# EAGLE board telegraph (EAGLE 6.4)
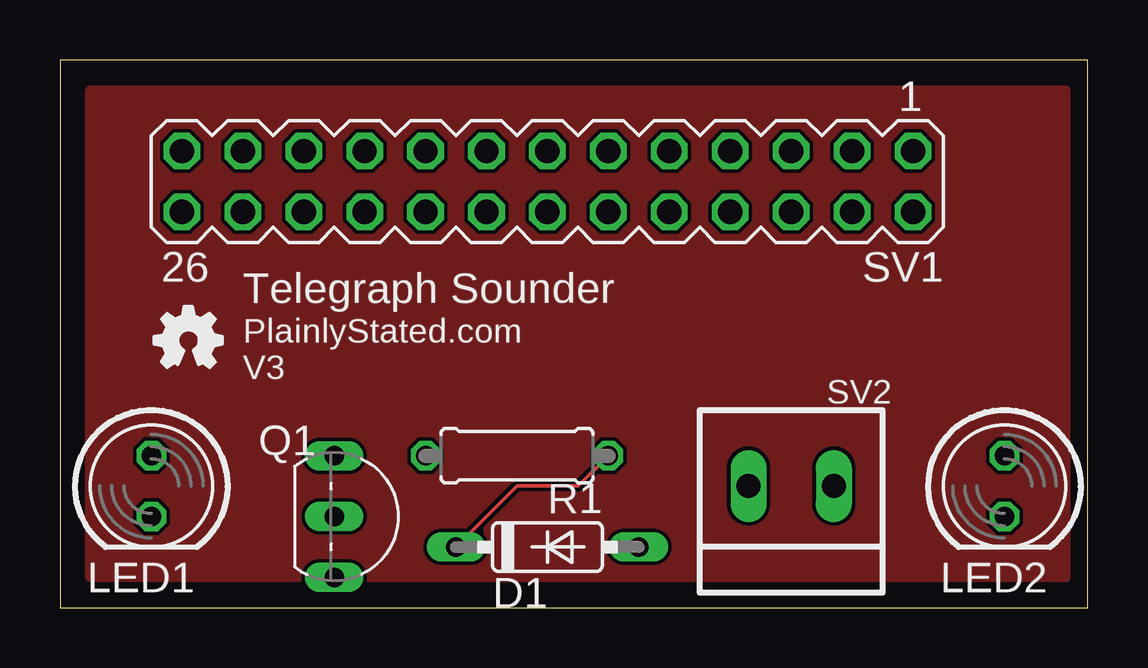
[diagram p0: board, top side]
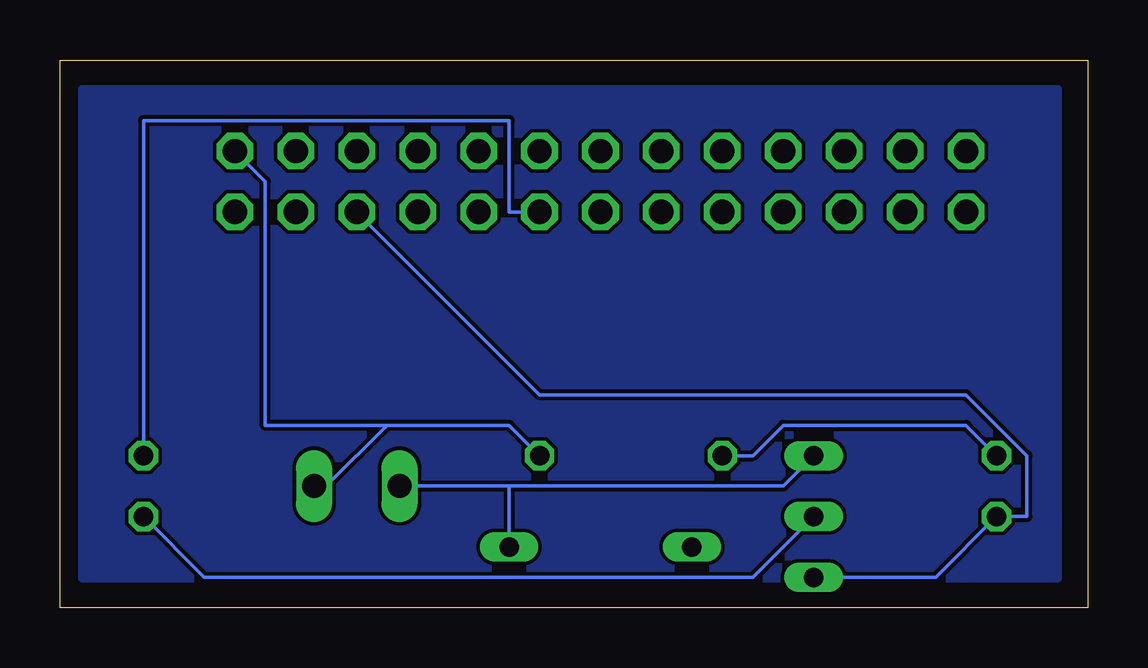
[diagram p1: board, bottom side, seen from below]

Size 42.85 x 22.85 mm. Coordinates in mm from the lower left corner, seen from the top.
Outline: 0,0 42.85,0 42.85,22.85 0,22.85 0,0
Copper layers (1*16): Top 0.0356mm / dielectric 1.5011mm / Bottom 0.0356mm
Design rules "default": minimum track width 6mil, minimum drill 13mil, track to track 6mil, track to pad 6mil, pad to pad 6mil, via to via 6mil, smd to smd 6mil, copper to edge 15mil, drill to drill 6mil, minimum pad ring 7mil, minimum via ring 7mil, stop-mask expansion 4mil, vias tented up to drill 0mil, thermal gap 10mil

## Footprints (pad centres in the part's own frame; a part is rotated, then mirrored left to right if it is on the bottom)
DO35-7 = drill 0.813 long: A 3.81,0; C -3.81,0
LED5MM = drill 0.813 octagon: A -1.27,0; K 1.27,0
TO92-EBC = drill 0.813 long: B 0,-1.27; C -2.54,-1.27; E 2.54,-1.27
0207/7 = drill 0.813 octagon: 1 -3.81,0; 2 3.81,0
MA13-2 = drill 1.016 octagon: 1 -15.24,-1.27; 2 -15.24,1.27; 3 -12.7,-1.27; 4 -12.7,1.27; 5 -10.16,-1.27; 6 -10.16,1.27; 7 -7.62,-1.27; 8 -7.62,1.27; 9 -5.08,-1.27; 10 -5.08,1.27; 11 -2.54,-1.27; 12 -2.54,1.27; 13 0,-1.27; 14 0,1.27; 15 2.54,-1.27; 16 2.54,1.27; 17 5.08,-1.27; 18 5.08,1.27; 19 7.62,-1.27; 20 7.62,1.27; 21 10.16,-1.27; 22 10.16,1.27; 23 12.7,-1.27; 24 12.7,1.27; 25 15.24,-1.27; 26 15.24,1.27
HEADER2 = drill 1 long: 1 -1.778,0; 2 1.778,0

## Placement (x,y rotation side)
D1  1N4148  [DO35-7]  20.32,2.54 0 top
LED1  red  [LED5MM]  3.81,5.08 270 top
LED2  green  [LED5MM]  39.37,5.08 270 top
Q1  MPSA42  [TO92-EBC]  12.7,3.81 270 top
R1  470  [0207/7]  19.05,6.35 0 top
SV1  SV1  [MA13-2]  20.32,17.78 180 top
SV2  HEADER2  [HEADER2]  30.48,5.08 180 top
U$1  [OSHW_FILLX100_NOTEXT]  3.94,10.03 0 top

## Library data of the parts
D1 = diode
LED1 LED2 = led
Q1 = transistor-npn
R1 = rcl
SV1 = con-lstb; OC_FARNELL: unknown; OC_NEWARK: unknown
SV2 = plainlystated
U$1 = ohw-logo

## Nets
N$1: LED1.A R1.1
N$3: D1.A Q1.C SV2.2
N$4: LED1.K Q1.E SV1.6
N$5: LED2.K Q1.B
N$6: D1.C R1.2 SV1.1 SV2.1
N$7: LED2.A SV1.12

## Tracks (layer width: path | path; a pad name or v marks a point on that pad's centre or on a via)
N$1
  Bottom 0.152: LED1.A 5.08,7.62 12.7,7.62 13.97,6.35 R1.1
N$2
  pour Bottom: 1.27,21.59 41.91,21.59 41.91,1.27 1.27,1.27
N$3
  Bottom 0.152: Q1.C 12.7,5.08 24.13,5.08 | SV2.2 29.21,5.08 SV2.2 | SV2.2 24.13,5.08 | 24.13,5.08 D1.A
N$4
  Bottom 0.152: Q1.E 6.35,1.27 LED1.K 2.54,3.81 2.54,6.35 5.08,8.89 22.86,8.89 SV1.6
N$5
  Bottom 0.152: Q1.B 13.97,1.27 36.83,1.27 LED2.K
N$6
  Top 0.152: D1.C 19.05,5.08 21.59,5.08 R1.2
  Bottom 0.152: 29.21,7.62 31.75,5.08 SV2.1 | 29.21,7.62 24.13,7.62 R1.2 | SV1.1 34.29,17.78 34.29,7.62 29.21,7.62
N$7
  Bottom 0.152: LED2.A 39.37,20.32 24.13,20.32 24.13,16.51 SV1.12
N$8
  pour Top: 1.27,21.59 41.91,21.59 41.91,1.27 1.27,1.27

## Text on the board
_tsilk: Telegraph Sounder | PlainlyStated.com / V3